# Altium PCB PCB1.PcbDoc
Units mm, origin at the board's own origin, x right, y up, seen from the top; angles counter-clockwise.
Board outline 100 x 120 mm, 2 copper layers (Top Layer, Bottom Layer); 99 components, 94 nets, 331 pads, 140 vias.
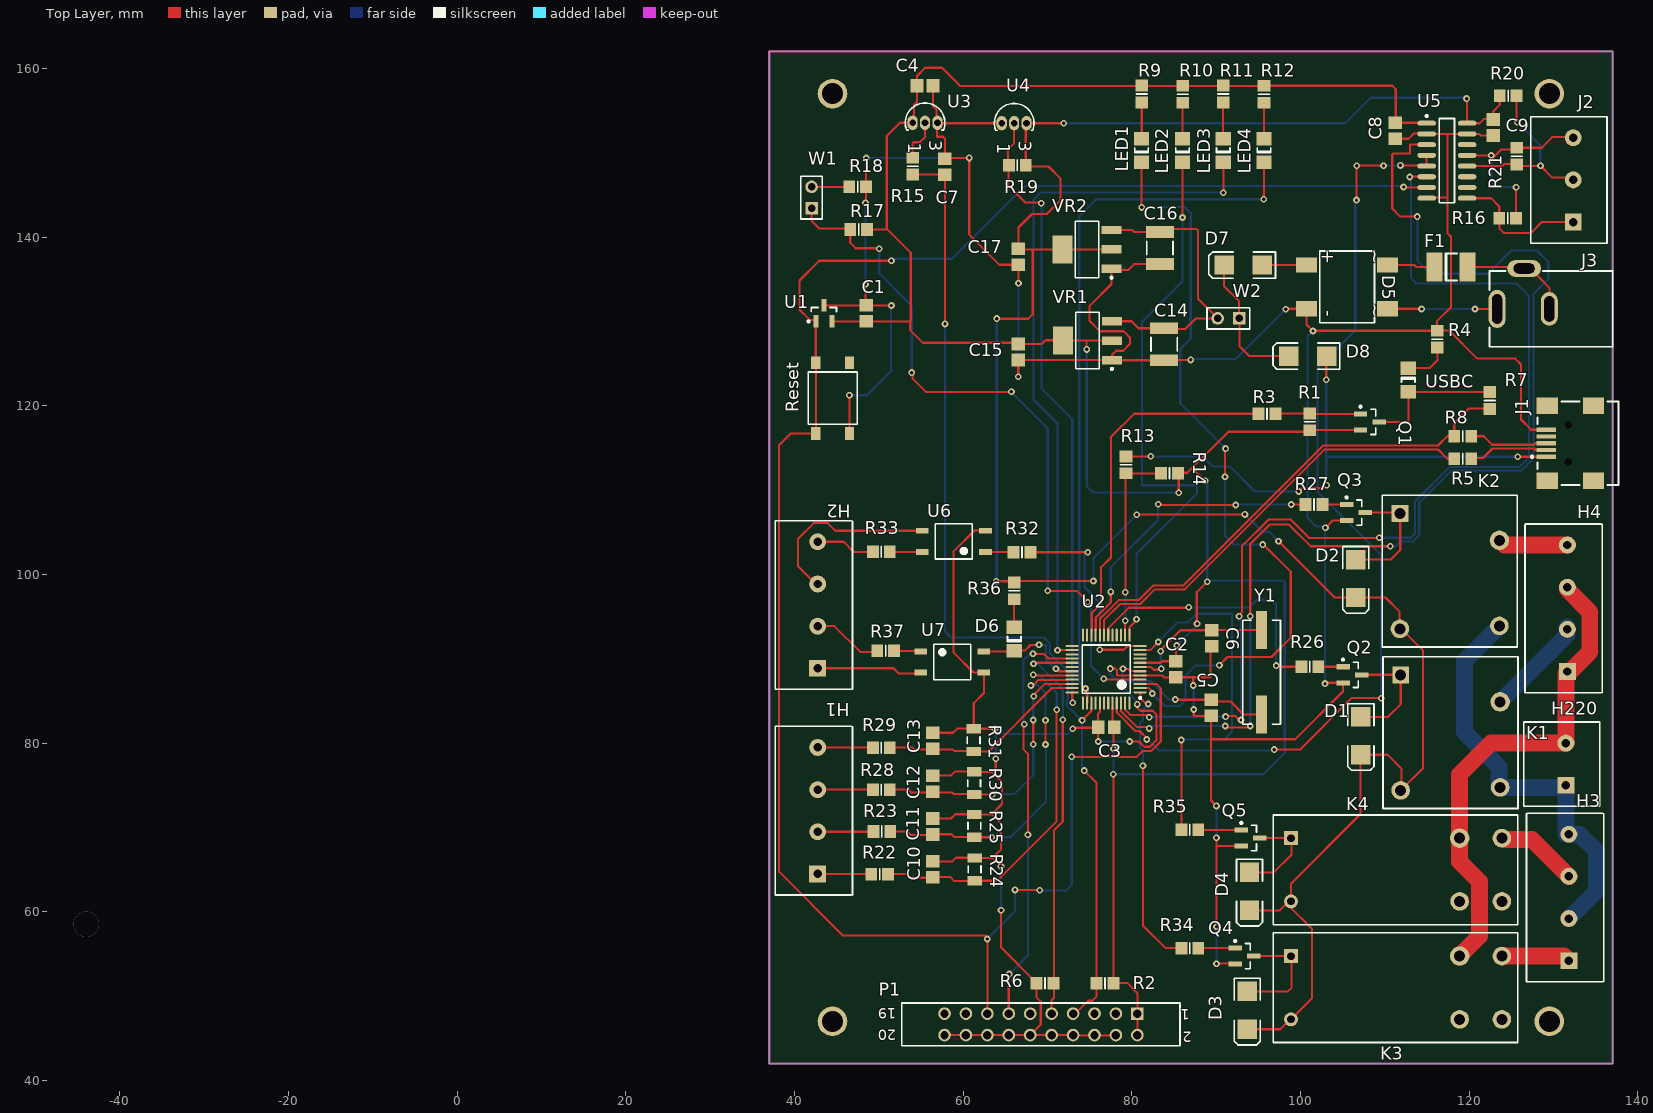
[diagram p0: Top Layer view]
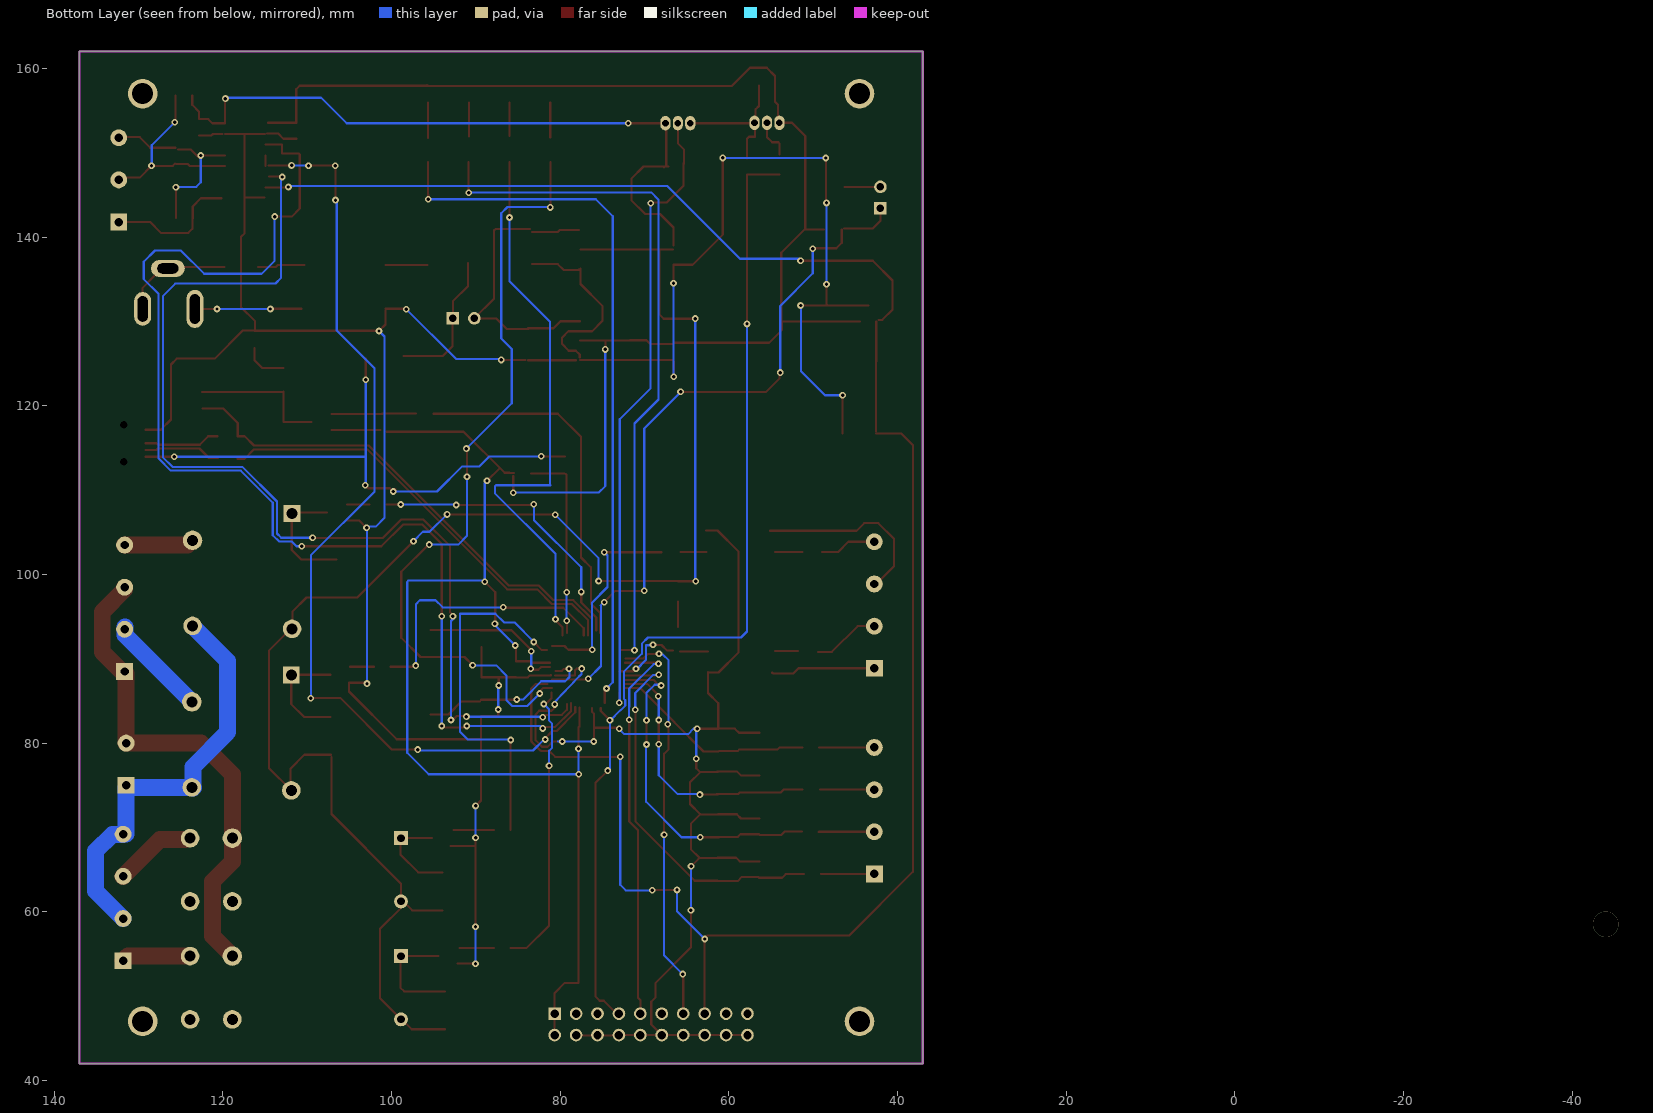
[diagram p1: Bottom Layer view, seen from below]

## Layer stack, top to bottom
Top Layer: signal copper 0.0356
Dielectric: dielectric 0.32, FR-4, Dk 4.8
Bottom Layer: signal copper 0.0356

## Board outline
37,42 37,162 137,162 137,42

## Design rules (kind name [scope] priority, off if disabled: settings)
AcuteAngle [All] p1: minimum=6.00000000000000E+0001
Clearance [All] p1: gap=0.2
DiffPairsRouting [(InNet('D_N') AND InNet('D_P'))] p1: maxlimit=0.254 minlimit=0.254 mostfreqgap=0.254 maxuncoupledlength=12.7
Height [All] p1: minheight=0 maxheight=26 prefheight=12.7
HoleSize [All] p1: absolutevalues=TRUE maxlimit=4.5 minlimit=0.4 maxpercent=80.000 minpercent=20.000
MinimumAnnularRing [All] p1: minimumring=0.2
MinimumSolderMaskSliver [All] p1: minsoldermaskwidth=0.1
PlaneClearance [All] p1: clearance=0.5
PolygonConnect [All] p1: connectstyle=Relief reliefconductorwidth=0.254 reliefentries=4 polygonreliefangle="90 Angle"
RoutingVias [All] p1: holewidth=0.5 width=0.9 viastyle="Through Hole" minholewidth=0.4 minwidth=0.8 maxholewidth=0.7 maxwidth=2.54
SilkToSilkClearance [All] p1 off: silktosilkclearance=0.254
SilkscreenOverComponentPads [All] p1 off: minsilkscreentomaskgap=0.254
SolderMaskExpansion [All] p1: expansion=0.2
ViasUnderSMD [All] p1: allowed=FALSE
Width 220V_relay [InNetClass('220V_r')] p1: maxlimit=2 minlimit=2 preferedwidth=2
Width "Power, GND nets" [(InNet('+3.3V') AND InNet('GND') AND InNet('GND485') AND InNet('VBUS') AND InNet('VCC5') AND InNet('VCC33'))] p2: maxlimit=0.4 minlimit=0.4 preferedwidth=0.4
Width [All] p3: maxlimit=0.254 minlimit=0.254 preferedwidth=0.254
21 further rules are at their usual default settings.

## Classes and differential pairs
component class Sheet1: C1 C2 C3 C4 C5 C6 C7 C8 C9 H1 H2 H3 H4 H220 J1 J2 LED1 Led1 LED2 LED3 LED4 P1 Q1 R1 R2 R3 R4 R5 R6 R7 R8 R9 R10 R11 R12 R13 R14 R15 R16 R17 R18 R19 R20 R21 Reset U1 U2 U3 U4 U5 USBC W1 Y1
component class Slave_Sheet2: C10 C11 C12 C13 C14 C15 C16 C17 D1 D2 D3 D4 D5 D6 D7 D8 F1 J3 K1 K2 K3 K4 Q2 Q3 Q4 Q5 R22 R23 R24 R25 R26 R27 R28 R29 R30 R31 R32 R33 R34 R35 R36 R37 U6 U7 VR1 VR2 W2
net class 220V_r: H3_2 H4_1 NetH3_1 NetH3_3 NetH4_2 NetH4_4
differential pair D2: +D2_P -D2_N
differential pair D1: +D1_P -D1_N

## Components (designator, comment, footprint, x,y, rotation, side; value= is the part's Value field where it differs from the comment)
C1 "Cap Semi" CAPC2012M 48.498,130.947 r270 top
C2 "Cap Semi" CAPC2012M 85.217,88.748 r90 top
C3 "Cap Semi" CAPC2012M 76.947,81.893 r0 top
C4 "Cap Semi" CAPC2012M 55.474,157.937 r180 top
C5 "Cap Semi" CAPC2012M 89.383,84.176 r90 top
C6 "Cap Semi" CAPC2012M 89.459,92.431 r90 top
C7 "Cap Semi" CAPC2012M 57.834,148.344 r270 top
C8 "Cap Semi" CAPC2012M 111.252,152.603 r270 top
C9 "Cap Semi" CAPC2012M 122.834,152.984 r90 top
C10 "Cap Semi" CAPC2012M 56.388,65.024 r270 top
C11 "Cap Semi" CAPC2012M 56.388,70.104 r270 top
C12 "Cap Semi" CAPC2012M 56.388,75.184 r270 top
C13 "Cap Semi" CAPC2012M 56.388,80.264 r270 top
C14 "Cap Pol3" CAPC4532L 83.82,127.279 r270 top
C15 "Cap Semi" CAPC2012M 66.548,126.365 r90 top
C16 "Cap Pol3" CAPC4532L 83.312,138.684 r270 top
C17 "Cap Semi" CAPC2012M 66.548,137.668 r90 top
D1 "SMBJ5.0CA" SMB 107.146,80.859 r270 top
D2 "SMBJ5.0CA" SMB 106.546,99.501 r270 top
D3 "SMBJ5.0CA" SMB 93.683,48.306 r270 top
D4 "SMBJ5.0CA" SMB 93.941,62.41 r270 top
D5 "Bridge1" DB-1S 105.512,134.087 r90 top
D6 "LED2" CD3216-1206 66.04,92.348 r270 top
D7 "SMBJ5.0CA" SMB 93.218,136.677 r180 top
D8 "SMBJ5.0CA" SMB 100.838,125.882 r180 top
F1 "Fuse 2" CD4532-1812 117.856,136.449 r180 top
H1 "Klemnik4_my" Klemnik4_5mm 46.736,61.976 r90 top
H2 "Klemnik4_my" Klemnik4_5mm 46.736,86.36 r90 top
H3 "Klemnik4_my" Klemnik4_5mm 135.814,51.689 r90 top
H4 "Klemnik4_my" Klemnik4_5mm 135.636,85.979 r90 top
H220 "Header 2" Klemnik2_5mm 135.458,72.492 r90 top
J1 "USB-B" "MINI USB" 137,115.545 r0 top
J2 "CON3" Klemnik3_5mm 136.324,139.272 r90 top
J3 "PWR2.5" KLD-0202 137,131.47 r180 top
K1 "Relay-5VDC-10A" TRCF-SB 117.77,81.237 r270 top
K2 "Relay-5VDC-10A" TRCF-SB 117.678,100.387 r270 top
K3 "Relay-5VDC-16A" TRIH-AE 111.265,50.988 r0 top
K4 "Relay-5VDC-16A" TRIH-AE 111.265,64.97 r0 top
LED1 "LED2" CD3216-1206 81.155,150.274 r270 top
LED2 "LED2" CD3216-1206 86.01,150.274 r270 top
LED3 "LED2" CD3216-1206 90.84,150.274 r270 top
LED4 "LED2" CD3216-1206 95.67,150.274 r270 top
P1 "JTAG20" JTAG_SWD_2.54 80.643,47.915 r180 top
Q1 "MMBT2907LT1" SOT23_M 108.204,118.085 r0 top
Q2 "PMBT5551" SOT23_M 106.13,88.092 r0 top
Q3 "PMBT5551" SOT23_M 106.546,107.324 r0 top
Q4 "PMBT5551" SOT23_M 93.341,54.738 r0 top
Q5 "PMBT5551" SOT23_M 94.069,68.736 r0 top
R1 "Res Semi" RESC2012M 101.092,118.085 r270 top
R2 "Res Semi" RESC2012M 76.815,51.535 r180 top
R3 "Res Semi" RESC2012M 96.012,119.05 r180 top
R4 "Res Semi" RESC2012M 116.205,127.889 r270 top
R5 "Res Semi" RESC2012M 119.228,113.716 r0 top
R6 "Res Semi" RESC2012M 69.703,51.535 r180 top
R7 "Res Semi" RESC2012M 122.428,120.625 r90 top
R8 "Res Semi" RESC2012M 119.228,116.383 r0 top
R9 "Res Semi" RESC2012M 81.16,156.946 r270 top
R10 "Res Semi" RESC2012M 86.01,156.928 r270 top
R11 "Res Semi" RESC2012M 90.82,156.946 r90 top
R12 "Res Semi" RESC2012M 95.67,156.928 r270 top
R13 "Res Semi" RESC2012M 79.299,112.979 r90 top
R14 "Res Semi" RESC2012M 84.455,111.989 r180 top
R15 "Res Semi" RESC2012M 54.012,148.395 r90 top
R16 "Res Semi" RESC2012M 124.559,142.226 r180 top
R17 "Res Semi" RESC2012M 47.6,140.894 r0 top
R18 "Res Semi" RESC2012M 47.481,145.948 r180 top
R19 "Res Semi" RESC2012M 66.41,148.523 r0 top
R20 "Res Semi" RESC2012M 124.61,156.748 r0 top
R21 "Res Semi" RESC2012M 125.622,149.588 r270 top
R22 "Res Semi" RESC2012M 50.098,64.455 r180 top
R23 "Res Semi" RESC2012M 50.346,69.512 r180 top
R24 "Res Varistor" RESC3216L 61.36,65.024 r270 top
R25 "Res Varistor" RESC3216L 61.316,70.18 r270 top
R26 "Res Semi" RESC2012M 101.092,89.052 r180 top
R27 "Res Semi" RESC2012M 101.6,108.28 r180 top
R28 "Res Semi" RESC2012M 50.292,74.473 r180 top
R29 "Res Semi" RESC2012M 50.292,79.456 r180 top
R30 "Res Varistor" RESC3216L 61.29,75.235 r270 top
R31 "Res Varistor" RESC3216L 61.239,80.344 r270 top
R32 "Res Semi" RESC2012M 66.964,102.616 r0 top
R33 "Res Semi" RESC2012M 50.292,102.667 r0 top
R34 "Res Semi" RESC2012M 86.868,55.677 r180 top
R35 "Res Semi" RESC2012M 86.868,69.698 r180 top
R36 "Res Semi" RESC2012M 66.04,98.044 r270 top
R37 "Res Semi" RESC2012M 50.8,90.932 r180 top
Reset "Reset" BUTTON 44.526,120.904 r270 top
U1 "MCP130T-300I/TT" SOT-23-TT3_N 43.469,130.947 r90 top
U2 "LPC1343FBD48" LQFP48_L 76.947,88.763 r180 top
U3 "TMP35" PR35 55.474,153.543 r270 top
U4 "DS1820" PR35 66.04,153.492 r270 top
U5 "ADM2483" SO16_N 117.348,149.047 r0 top
U6 "KPC357" Micro-Flat 58.882,103.913 r180 top
U7 "KPC357" Micro-Flat 58.699,89.611 r0 top
USBC "LED2" CD3216-1206 112.776,123.063 r90 top
VR1 "LM1117IMP-3.3" MP04A_N 74.727,127.711 r180 top
VR2 "LM1117IMP-5.0" MP04A_N 74.676,138.532 r180 top
W1 "Jumper" HDR1X2 42.02,143.408 r90 top
W2 "Button_inner" HDR1X2 92.71,130.353 r180 top
Y1 "12MZ" HC-49SM 95.377,88.392 r270 top

## Footprints (in the part's own frame and the unit in brackets; to place one, negate y for a bottom-side part, rotate by r counter-clockwise, add the part's x,y. Pads: shape width x height; smd on the part's side, far side on the other; paste and mask are expansions set on the pad)
BUTTON [mm] "DTSGL-61M"
  rect 1.5x1.1 smd: 1(-4.2,2) 2(4.2,2) 3(-4.2,-2) 4(4.2,-2)
  silkscreen extent -3.1,-2.9 3.1,2.9
CAPC2012M [mm] "Chip Capacitor, Body 2.0x1.3mm, IPC Low Density"
  rect 1.5x1.6 smd: 1(-0.95,0) 2(0.95,0)
  body extent -1.1,-0.72 1.1,0.72, height 1.1
CAPC4532L [mm] "Chip Capacitor, Body 4.5x3.2mm, IPC High Density"
  rect 1.4x3.3 smd: 1(-1.9,0) 2(1.9,0)
  silkscreen extent -0.8,-1.55 0.8,1.55, body extent -2.4,-1.7 2.4,1.7, height 1.4
CD3216-1206 [mm] "Chip Diode; Body 3.2 x 1.6 mm (LxW typ)"
  rect 1.6x1.8 smd: 1(-1.4,0) 2(1.4,0)
  silkscreen extent -0.3,-0.8 0.3,0.8
CD4532-1812 [mm] "Chip Diode; Body 4.5 x 3.2 mm (LxW typ)"
  rect 1.9x3.4 smd: 1(-1.95,0) 2(1.95,0)
  silkscreen extent -0.7,-1.6 0.7,1.6
DB-1S [mm] "Bridge Rectifier; 4 Terminals;"
  rect 1.8x2.5 smd: 1(2.6,4.8) 2(-2.6,-4.8) 3(-2.6,4.8) 4(2.6,-4.8)
  silkscreen extent -4.25,-3.25 4.25,3.25, body extent -4.29,-3.25 4.32,3.22, height 2.5
HC-49SM [mm] "Quartz Crystal,"
  rect 4.5x1.3 smd: 1(-5,0) 2(5,0)
  silkscreen extent -6.15,-2.25 6.15,2.25
HDR1X2 [mm] "Connector; Header; 2 Position"
  rect 1.5x1.5 hole 0.9: 1(0,0)
  round 1.5 hole 0.9: 2(2.54,0)
  silkscreen extent -1.27,-1.27 3.81,1.27
JTAG_SWD_2.54 [mm] "Connector; Header; 10x2 Position"
  rect 1.5x1.5 hole 1: 1(0,0)
  round 1.5 hole 1: 2(0,2.54) 3(2.54,0) 4(2.54,2.54) 5(5.08,0) 6(5.08,2.54) 7(7.62,0) 8(7.62,2.54) 9(10.16,0) 10(10.16,2.54) 11(12.7,0) 12(12.7,2.54) 13(15.24,0) 14(15.24,2.54) 15(17.78,0) 16(17.78,2.54) 17(20.32,0) 18(20.32,2.54) 19(22.86,0) 20(22.86,2.54)
  silkscreen extent -5.08,-1.27 27.94,3.81
KLD-0202 [mm]
  oval 2x4.5 hole 1.2 slot 3.5 at 90 deg: 1(13.7,0)
  oval 2x4 hole 1.2 slot 3 at 90 deg: 2(7.5,0)
  oval 4x2 hole 1.2 slot 2.5 at 0 deg: 3(10.5,-4.8)
  silkscreen extent 0,-4.5 14.6,4.5
Klemnik2_5mm [mm] "Connector; Header; 2 Position"
  rect 2x2 hole 1: 1(2.5,4)
  round 2 hole 1: 2(7.5,4)
  silkscreen extent 0,0 10,9
Klemnik3_5mm [mm] "Connector; Header; 3 Position"
  rect 2x2 hole 1: 1(2.5,4)
  round 2 hole 1: 2(7.5,4) 3(12.5,4)
  silkscreen extent 0,0 15,9.02
Klemnik4_5mm [mm] "Connector; Header; 8 Position"
  rect 2x2 hole 1: 1(2.5,4)
  round 2 hole 1: 2(7.5,4) 3(12.5,4) 4(17.5,4)
  silkscreen extent 0,-0.13 20,9.02
LQFP48_L [mm] "Thin QFP, 48-Leads, Body 7x7mm, Pitch 0.5mm, IPC High Density"
  oval 1.55x0.25 smd: 1(-4.025,2.75) 2(-4.025,2.25) 3(-4.025,1.75) 4(-4.025,1.25) 5(-4.025,0.75) 6(-4.025,0.25) 7(-4.025,-0.25) 8(-4.025,-0.75) 9(-4.025,-1.25) 10(-4.025,-1.75) 11(-4.025,-2.25) 12(-4.025,-2.75) 25(4.025,-2.75) 26(4.025,-2.25) 27(4.025,-1.75) 28(4.025,-1.25) 29(4.025,-0.75) 30(4.025,-0.25) 31(4.025,0.25) 32(4.025,0.75) 33(4.025,1.25) 34(4.025,1.75) 35(4.025,2.25) 36(4.025,2.75)
  oval 0.25x1.55 smd: 13(-2.75,-4.025) 14(-2.25,-4.025) 15(-1.75,-4.025) 16(-1.25,-4.025) 17(-0.75,-4.025) 18(-0.25,-4.025) 19(0.25,-4.025) 20(0.75,-4.025) 21(1.25,-4.025) 22(1.75,-4.025) 23(2.25,-4.025) 24(2.75,-4.025) 37(2.75,4.025) 38(2.25,4.025) 39(1.75,4.025) 40(1.25,4.025) 41(0.75,4.025) 42(0.25,4.025) 43(-0.25,4.025) 44(-0.75,4.025) 45(-1.25,4.025) 46(-1.75,4.025) 47(-2.25,4.025) 48(-2.75,4.025)
  silkscreen extent -4.15,-2.85 2.85,3.55, body extent -3.5,-3.5 3.5,3.5, height 1.6
Micro-Flat [mm] "Micro-Flat"
  rect 1.5x0.7 smd: 1(-3.75,1.257) 2(-3.75,-1.257) 3(3.75,-1.257) 4(3.75,1.257)
  silkscreen extent -2.2,-2.1 2.2,2.1, body extent -2.67,-2.41 2.67,2.41, height 2.3
"MINI USB" [mm] "Connector; USB2.0, Type A, SM; 5 Position; Right Angle"
  rect 2.3x0.5 smd: 1(-7.85,-1.6) 2(-7.85,-0.8) 3(-7.85,0) 4(-7.85,0.8) 5(-7.85,1.6)
  rect 2.5x2 smd: 6(-7.75,4.45) 7(-2.25,4.45) 8(-7.75,-4.45) 9(-2.25,-4.45)
  round 0.6 hole 0.9 unplated: MH1(-5.25,2.2) MH2(-5.25,-2.2)
  silkscreen extent -9.67,-4.95 0.7,4.95
MP04A_N [mm] "SOT223, 4-Leads, Body 6.5x3.5mm, Pitch 2.3mm, Lead Span 7mm, IPC Medium Density"
  rect 2.4x1 smd: 1(-2.9,2.3) 2(-2.9,0) 3(-2.9,-2.3)
  rect 2.4x3.3 smd: 4(2.9,0)
  silkscreen extent -3.03,-3.35 1.4,3.47, body extent -1.85,-3.35 1.85,3.35, height 1.8
PR35 [mm] "TO, Flat Index; 3 In-Line, Axial Leads; Body Dia. 4.6mm; Leads 0.56 x 0.51 mm (max)"
  oval 1.7x1.2 hole 0.8: 1(0,-1.473) 2(0,0) 3(0,1.473)
  silkscreen extent -2.34,-2.35 0.85,2.35
RESC2012M [mm] "Chip Resistor, Body 2.0x1.3mm, IPC Low Density"
  rect 1.4x1.5 smd: 1(-1,0) 2(1,0)
  silkscreen extent 0,-0.65 0,0.65, body extent -1.07,-0.7 1.07,0.7, height 0.65
RESC3216L [mm] "Chip Resistor, Body 3.1x1.6mm, IPC High Density"
  rect 1.1x1.7 smd: 1(-1.35,0) 2(1.35,0)
  silkscreen extent -0.4,-0.75 0.4,0.75, body extent -1.68,-0.87 1.68,0.87, height 2.54
SMB [mm] "DO-214-AA/SMB; 2 C-Bend Leads; Body 5.3 x 3.6 mm, inc. leads (LxW)"
  rect 2.3x2.3 smd: 1(-2.25,0) 2(2.25,0)
  silkscreen extent -3.8,-1.55 4.1,1.55
SO16_N [mm] "SOIC, 16-Leads, Body 9.9x3.9mm, Pitch 1.27mm, IPC Medium Density"
  oval 2.2x0.6 smd: 1(-2.4,4.445) 2(-2.4,3.175) 3(-2.4,1.905) 4(-2.4,0.635) 5(-2.4,-0.635) 6(-2.4,-1.905) 7(-2.4,-3.175) 8(-2.4,-4.445) 9(2.4,-4.445) 10(2.4,-3.175) 11(2.4,-1.905) 12(2.4,-0.635) 13(2.4,0.635) 14(2.4,1.905) 15(2.4,3.175) 16(2.4,4.445)
  silkscreen extent -2.52,-5 0.9,5.42, body extent -1.95,-4.95 1.95,4.95, height 1.75
SOT23_M [mm] "SOT23, 3-Leads, Body 2.9x1.3mm, Pitch 0.95mm, Lead Span 2.3mm, IPC Low Density"
  rect 1.6x0.6 smd: 1(-1.1,0.95) 2(-1.1,-0.95) 3(1.1,0)
  silkscreen extent -1.22,-1.5 0.7,1.92, body extent -0.7,-1.5 0.7,1.5, height 1.1
SOT-23-TT3_N [mm] "SOT23, 3-Leads, Body 2.9x1.3mm, Pitch 0.95mm, Lead Span 2.4mm, IPC Medium Density"
  rect 1.5x0.6 smd: 1(-0.95,0.95) 2(-0.95,-0.95) 3(0.95,0)
  silkscreen extent -1.07,-1.5 0.7,1.92, body extent -0.7,-1.5 0.7,1.5, height 1.12
TRCF-SB [mm] "DIP; 5 Round Pins; Row Space 15.24 mm; Pitch 5 mm"
  rect 2x2 hole 1.3: 1(-6.85,-5.9)
  round 2.2 hole 1.3: 2(6.85,-5.9) 4(6.5,5.9)
  round 2.3 hole 1.3: 3(-3.65,5.9)
  silkscreen extent -9,-8 9,8
TRIH-AE [mm] "DIP; 5 Round Pins; Row Space 15.24 mm; Pitch 5 mm"
  rect 1.65x1.65 hole 0.9: 1(-12.4,3.75)
  round 2.3 hole 1.3: 3(7.6,3.75)
  round 2.2 hole 1.3: 4(12.6,3.75) 5(12.6,-3.75) 6(7.6,-3.75)
  round 1.65 hole 0.9: 8(-12.4,-3.75)
  silkscreen extent -14.5,-6.5 14.5,6.5

## Part data
C1 C2 C3 C4 C5 C6 C7 C8 C9 C10 C11 C12 C13 C15 C17: "Capacitor (Semiconductor SIM Model)"
C14 C16: "Polarized Capacitor (Surface Mount)"
D1 D2 D3 D4 D7 D8: library part "Diode 1N4007", "1 Amp General Purpose Rectifier"
D5: "Full Wave Diode Bridge"
D6 LED1 LED2 LED3 LED4 USBC: "Typical RED, GREEN, YELLOW, AMBER GaAs LED"
F1: "Fuse"
H1 H2 H3 H4: "Header, 4-Pin, 300-041-12"
H220: "Header, 2-Pin"
J1: library part "USB connector 5", "USB connector, 5-Pin"
J2: library part "RS485 Klemnik 3", "Header, 3-Pin"
J3: "Low Voltage Power Supply Connector"
K1 K2: "TRCF-5VDC-SB-A"
K3 K4: "TRIH-5VDC-SD-1AE-R"
P1: library part "Header 10X2", "Header, 10-Pin, Dual row"
Q1: "General Purpose Transistor PNP Silicon"
Q2 Q3 Q4 Q5: "NPN Switching Transistor"
R1 R2 R3 R4 R5 R6 R7 R8 R9 R10 R11 R12 R13 R14 R15 R16 R17 R18 R19 R20 R21 R22 R23 R26 R27 R28 R29 R32 R33 R34 R35 R36 R37: "Semiconductor Resistor"
R24 R25 R30 R31: "Varistor (Voltage-Sensitive Resistor)"
Reset: library part BUTTON, "DTSGL-61M"
U1: "Microcontroller Supervisory Circuit with Open Drain Output, 3-Pin SOT-23, Industrial Temperature, Tape and Reel"
U2: "ARM-based 32-bit MCU with 64 Kbytes Flash, 48-pin LQFP, Industrial Temperature"
U4: "1-Wire Digital Thermometer"
U5: "isolated rs-485 driver"
U6 U7: library part Optoisolator1, "4-Pin Phototransistor Optocoupler"
VR1 VR2: "800mA Low-Dropout Linear Regulator"
W1: "Jumper Wire"
W2: "Power Button"
Y1: library part XTAL, "Crystal Oscillator"

## Free pads (board coordinates)
  round 3.5 hole 2.5 unplated: 0(44.5,47) 0(44.5,157) 0(129.5,47) 0(129.5,157)

## Via types
v1: diameter 0.8, hole 0.4, Top Layer to Bottom Layer, 139 vias
v2: diameter 3, hole 3, Top Layer to Bottom Layer, 1 vias

## Nets (pads, with @x,y where several pads share a name; then routed paths per layer and width w, separated by ;. In a path a pad name is that pad's centre, name@x,y a point inside that pad or via, vN(x,y) a via of type N, cw(c..) or ccw(c..) an arc to the next point about the centre after c; other vN are vias at no path point)
D1_N: R5.1 U2.19 | length 52.2
  Top Layer w0.254: U2.19 76.697,93.701 76.674,93.724 76.674,94.556 78.613,96.495 80.972,96.495 82.702,98.225 86.262,98.225 102.859,114.822 116.292,114.822 117.399,113.716 R5.1
D1_P: R7.1 R8.1 U2.20 | length 59.4
  Top Layer w0.254: U2.20 76.197,93.701 76.22,93.724 76.22,94.744 78.425,96.949 80.784,96.949 82.514,98.679 86.074,98.679 102.671,115.276 116.292,115.276 117.399,116.383 R8.1 118.228,117.948 119.939,119.659 R7.1@122.377,119.659
D2_N: J1.2 R5.2 | length 9.1
  Top Layer w0.254: R5.2@120.574,113.792 121.633,113.792 122.758,114.918 127.691,114.918 127.864,114.745 J1.2
D2_P: J1.3 R8.2 | length 9
  Top Layer w0.254: R8.2@120.65,116.383 121.717,116.383 122.728,115.372 127.691,115.372 127.864,115.545 J1.3
GND: C1.1 C2.1 C3.1 C4.1 C5.1 C6.1 C7.1 C8.2 C9.1 C10.1 C11.1 C12.1 C13.1 C14.2 C15.1 C16.2 C17.1 D5.3 J1.5 P1.4 P1.6 P1.8 P1.10 P1.12 P1.14 P1.16 P1.18 P1.20 Q2.2 Q3.2 Q4.2 Q5.2 R4.1 R6.2 R18.1 R24.1 R25.1 R30.1 R31.1 Reset.2 U1.3 U2.5 U2.41 U3.3 U4.1 U5.2 U5.8 U5.15 U6.2 U7.3 VR1.1 VR2.1 | length 522.5
  Top Layer w0.254: U1.3 C1.1@48.336,131.897 ; v1(46.507,121.234) 46.526,121.215 Reset.2 ; C1.1@48.336,131.978 48.438,131.877 v1(51.486,131.877) ; C1.1@48.412,132.08 v1(48.412,134.391) ; v1(48.412,144.043) 48.481,144.112 R18.1 48.481,149.335 v1(48.514,149.368) ; C1.1 C1.1@48.585,131.897 ; C10.1 58.71,65.974 59.131,66.396 R24.1@61.316,66.396 ; C11.1 58.557,71.054 59.055,71.552 R25.1@61.29,71.552 ; C12.1 58.532,76.134 59.004,76.606 R30.1@61.392,76.606 ; C13.1 58.786,81.214 59.284,81.712 R31.1@61.239,81.712 ; C4.1 56.424,155.539 56.82,155.143 U3.3@56.82,153.67 ; U3.3@56.896,153.441 56.896,151.892 57.607,151.892 57.834,151.666 C7.1 ; U3.3@56.998,153.492 U4.1@64.668,153.492 ; P1.20 P1.18 P1.16 P1.14 P1.12 ; C7.1@57.937,149.377 v1(60.706,149.377) 60.706,140.284 64.287,136.703 C17.1@66.446,136.703 ; R30.1 63.428,76.585 63.856,77.013 v1(63.856,78.13) ; R25.1 63.351,71.53 63.373,71.552 ; R24.1 63.453,66.374 64.491,67.412 64.491,70.434 63.373,71.552 ; U7.3 61.226,88.354 58.864,90.716 58.864,102.73 61.329,105.194 U6.2@62.7,105.194 ; U7.3@62.459,88.443 62.459,85.928 61.239,84.709 R31.1@61.239,81.712 ; 63.398,76.556 64.592,75.362 64.592,72.771 63.373,71.552 ; 63.525,66.294 63.576,66.294 v1(64.465,65.405) ; v1@63.746,81.694 R31.1 R31.1@61.239,81.712 ; v1(64.491,60.173) 64.491,55.748 R6.2 ; v1(66.523,123.444) C15.1@66.523,125.222 ; v1(66.548,134.518) C17.1 ; C15.1@66.638,125.411 VR1.1 ; R6.2@68.707,51.435 68.707,49.809 69.19,49.327 69.19,46.622 P1.12 ; v1(73,81.686) 73.127,81.813 C3.1@75.997,81.813 ; v1(75.997,80.188) C3.1 75.997,83.49 76.2,83.693 U2.41@76.2,84.15 ; v1(77.445,88.824) 78.029,88.824 78.232,88.621 78.232,88.062 78.283,88.011 U2.5@80.569,88.011 ; VR2.1 77.576,134.421 74.985,131.83 74.985,130.044 76.2,128.829 79.019,128.829 79.756,128.092 79.756,127.305 78.969,126.517 78.13,126.517 77.673,126.06 VR1.1@77.673,125.705 ; VR2.1@77.775,136.144 77.826,136.093 79.578,136.093 80.269,136.784 C16.2 ; VR1.1@78.125,125.379 C14.2 ; P1.4@78.207,45.339 73.127,45.339 73.09,45.375 P1.8 P1.10 P1.12 ; v1(79.731,80.188) 80.264,80.188 80.848,80.188 81.483,79.553 82.144,79.553 82.906,80.315 82.906,83.388 82.474,83.82 81.013,83.82 v1@80.645,84.188 ; U2.5@81.102,88.036 81.077,88.011 83.591,88.011 83.82,87.782 C2.1@85.09,87.782 ; C14.2@84.125,125.425 v1(86.97,125.425) ; C2.1 89.306,87.798 C6.1@89.306,91.364 ; v1(87.274,86.817) 87.274,87.63 ; 87.325,83.236 87.335,83.226 ; v1(87.335,83.983) 87.335,83.226 ; 89.433,80.442 99.365,80.442 105.03,86.107 Q2.2 102.991,87.142 v1(102.895,87.046) ; 90.018,67.793 v1(90.018,68.783) ; v1(90.018,72.542) 89.383,73.177 C5.1 87.335,83.226 ; v1(90.024,58.224) 90.024,67.786 Q5.2 ; v1@90.119,53.746 v1(90.024,53.841) Q4.2@92.133,53.841 ; v1(98.247,131.445) 98.289,131.487 D5.3 ; D5.3@100.711,131.293 100.711,129.616 v1@101.438,128.889 ; v1(101.473,128.854) v1@101.438,128.889 ; v1(102.946,105.537) 102.972,105.537 103.835,106.401 105.258,106.401 Q3.2@105.258,106.477 ; C8.2 112.817,151.653 113.436,152.273 U5.2@114.757,152.273 ; U5.2@114.986,152.222 117.399,152.222 ; U5.8@115.062,144.678 117.399,144.678 ; R4.1@116.154,129.083 116.154,129.997 117.831,131.674 117.831,140.03 117.399,140.462 117.399,144.678 ; R4.1 v1@101.438,128.889 ; R4.1@116.357,128.93 117.602,128.93 120.955,125.578 125.451,125.578 126.137,124.892 126.137,118.364 127.356,117.145 J1.5 ; U5.15 117.399,152.222 ; U5.15@120.04,152.222 121.158,152.222 121.346,152.034 C9.1 ; 117.399,144.678 117.399,152.222
  Bottom Layer w0.254: v1(46.507,121.234) 48.59,121.234 51.435,124.079 51.435,131.826 v1(51.486,131.877) ; v1(48.412,134.391) v1(48.412,144.043) ; v1(48.514,149.368) 60.697,149.368 v1(60.706,149.377) ; v1(63.754,81.686) v1@63.856,81.585 ; v1(63.856,78.13) v1@63.856,81.585 ; v1@63.856,81.636 v1@63.856,81.585 ; v1@63.957,81.686 64.195,81.686 64.821,81.06 72.314,81.06 ; v1(64.465,65.405) 64.491,65.38 v1(64.491,60.173) ; v1(66.523,123.444) 66.548,123.469 v1(66.548,134.518) ; 72.314,81.077 72.314,81.06 ; v1@73,81.661 72.399,81.06 72.314,81.06 ; v1(75.997,80.188) 80.264,80.188 v1(79.731,80.188) ; v1(77.445,88.824) 77.445,88.189 77.749,87.884 ; 77.775,87.871 v1@80.756,84.743 ; v1(86.97,125.425) 87.071,125.527 92.329,125.527 v1(98.247,131.445) ; v1(87.274,86.817) 87.335,86.756 v1(87.335,83.983) ; v1(90.018,72.542) v1(90.018,68.783) v1@90.043,68.809 ; v1(90.024,53.841) v1(90.024,58.224) ; v1(101.473,128.854) 100.813,128.194 100.813,106.705 101.854,105.664 v1@102.972,105.664 ; v1(102.895,87.046) 102.895,105.486 v1(102.946,105.537)
  other v1: 80.62,84.582
GND485: J2.1 R16.2 U5.9 | length 15.9
  Top Layer w0.254: U5.9@120.154,144.591 122.592,144.591 123.559,143.623 R16.2 ; R16.2@123.596,142.189 123.596,140.97 124.079,140.487 127.33,140.487 128.615,141.772 J2.1
H3_2: H3.2 H3.4 H220.1 K1.4 K2.4 | length 60
  Bottom Layer w2: K1.4@123.469,74.727 K1.4@123.546,74.727 ; K1.4@123.546,74.651 K1.4@123.546,74.727 ; K2.4 119.431,89.74 119.431,81.28 123.546,77.165 ; H3.4@131.458,69.189 H220.1@131.458,74.727 ; H3.2 135.077,62.453 135.077,67.183 133.096,69.164 H3.4@131.826,69.164 ; K1.4@123.546,74.727 123.546,74.737 123.546,77.165 ; K1.4@123.546,74.727 123.67,74.727 H220.1@131.458,74.727 ; K1.4@123.546,74.727 123.546,77.165 ; K1.4@123.546,74.727 H220.1@131.458,74.727
H4_1: H4.1 H4.3 H220.2 K3.3 K4.3 | length 57.2
  Top Layer w2: K3.3@119.126,55.042 121.209,57.125 121.209,63.576 118.847,65.938 118.847,68.72 118.847,76.276 122.58,80.01 H220.2@131.115,80.01 ; H220.2 H4.1@131.458,88.253 ; H4.3 131.636,98.183 134.29,95.529 134.29,90.805 H4.1@131.978,88.494
NetC5_2: C5.2 U2.6 Y1.2 | length 20.4
  Top Layer w0.254: v1@79.172,88.798 v1(78.943,88.798) 79.553,88.798 79.807,88.544 U2.6@80.518,88.544 ; v1@85.176,85.126 C5.2 ; C5.2@89.51,84.938 91.694,84.938 93.24,83.392 Y1.2
  Bottom Layer w0.254: v1@78.892,88.621 78.892,87.833 79.4,87.325 79.451,87.325 ; 79.527,87.325 82.245,87.325 83.261,86.309 ; 83.261,86.284 84.379,85.166 v1@84.861,85.166
  other v1: 85.141,85.166
NetC6_2: C6.2 U2.7 Y1.1 | length 17.9
  Top Layer w0.254: U2.7@81.204,89.002 82.271,89.002 82.575,88.697 83.414,88.697 83.515,88.798 v1@83.541,88.798 ; v1(83.414,90.881) 83.414,91.034 85.761,93.381 C6.2 ; C6.2@89.506,93.392 Y1.1
  Bottom Layer w0.254: v1(83.414,90.881) 83.414,88.697 83.515,88.798 v1@83.541,88.798
  other v1: 83.464,88.798
NetC14_1: C14.1 C16.1 VR1.3 VR2.3 W2.2 | length 34.8
  Top Layer w0.254: VR1.3 79.945,130.011 80.777,129.179 C14.1 ; VR2.3@77.775,140.818 80.061,140.818 80.294,140.584 C16.1 ; C16.1@83.566,140.97 87.63,140.97 87.833,140.767 87.833,132.69 W2.2 87.605,130.353 86.36,129.108 C14.1@83.769,129.108
NetD1_1: D1.1 K1.1 Q2.3 | length 18.2
  Top Layer w0.254: D1.1@107.213,83.083 110.338,83.083 111.87,84.616 K1.1 ; K1.1@111.87,88.092 Q2.3 K1.1@111.984,88.092
NetD2_1: D2.1 K2.1 Q3.3 | length 13.7
  Top Layer w0.254: D2.1 110.666,101.751 111.811,102.895 111.811,107.036 K2.1@111.887,107.112 ; Q3.3 107.662,107.34 K2.1@111.379,107.34
NetD3_1: D3.1 K3.1 Q4.3 | length 13.1
  Top Layer w0.254: D3.1 98.485,50.556 98.933,51.003 K3.1@98.933,54.559 ; Q4.3 K3.1@98.577,54.738
NetD4_1: D4.1 K4.1 Q5.3 | length 11.5
  Top Layer w0.254: D4.1 96.816,64.66 98.941,66.785 K4.1@98.941,68.622 ; Q5.3 K4.1@98.93,68.736
NetD5_1: D5.1 D7.1 | length 5
  Top Layer w0.254: D7.1@95.742,136.687 D5.1
NetD5_2: D5.2 J3.1 | length 12.6
  Top Layer w0.254: D5.2@110.693,131.496 114.325,131.496 v1(114.351,131.47) ; v1(120.675,131.47) J3.1
  Bottom Layer w0.254: v1(114.351,131.47) v1(120.675,131.47)
NetD5_4: D5.4 F1.2 | length 5.6
  Top Layer w0.254: D5.4 113.478,136.687 113.741,136.423 F1.2@115.824,136.423
NetD6_1: D6.1 R36.2 | length 3
  Top Layer w0.254: D6.1 R36.2@66.04,96.774
NetD7_2: D7.2 D8.2 W2.1 | length 19.6
  Top Layer w0.254: W2.1 92.71,132.385 90.907,134.188 ; W2.1@92.761,130.302 92.761,127.051 93.929,125.882 D8.2 ; 90.907,134.188 90.907,136.677 90.907,136.906 90.907,134.188
NetF1_1: F1.1 J3.2 J3.3 | length 15.4
  Top Layer w0.254: F1.1 124.13,136.449 J3.3@126.238,136.449 ; J3.3@126.517,136.195 127.279,136.195 128.321,135.153 129.5,133.974 J3.2 J3.2@129.5,133.288 ; J3.3@126.238,136.449 126.458,136.229 126.517,136.169 J3.3@126.238,136.449
NetH1_1: H1.1 R22.2 | length 6.3
  Top Layer w0.254: H1.1 49.062,64.476 R22.2@49.073,64.465
NetH1_2: H1.2 R23.2 | length 6.7
  Top Layer w0.254: H1.2 R23.2@49.294,69.476 ; R23.2@49.294,69.476 49.302,69.468 49.327,69.444 R23.2@49.294,69.476
NetH1_3: H1.3 R28.2 | length 6.4
  Top Layer w0.254: H1.3 49.146,74.476 R28.2@49.149,74.473
NetH1_4: H1.4 R29.2 | length 6.5
  Top Layer w0.254: H1.4 R29.2@49.277,79.476
NetH2_1: H2.1 U7.2 | length 12.4
  Top Layer w0.254: H2.1 51.729,88.86 52.324,88.265 54.762,88.265 U7.2@54.839,88.341
NetH2_2: H2.2 R37.2 | length 7.9
  Top Layer w0.254: H2.2 44.722,93.86 47.777,90.805 R37.2@49.403,90.805
NetH2_3: H2.3 U6.3 | length 22.1
  Top Layer w0.254: H2.3@42.52,98.831 42.52,98.857 40.411,100.965 40.411,104.216 42.266,106.07 43.942,106.07 44.842,105.17 U6.3
NetH2_4: H2.4 R33.1 | length 6.7
  Top Layer w0.254: H2.4 45.822,103.86 47.041,102.641 R33.1@48.946,102.641
NetH3_1: H3.1 K3.4 | length 7.9
  Top Layer w2: K3.4@124.155,54.737 131.266,54.737 H3.1
NetH3_3: H3.3 K4.4 | length 9.2
  Top Layer w2: K4.4@124.384,68.58 127.423,68.58 H3.3
NetH4_2: H4.2 K1.3 | length 13.1
  Bottom Layer w2: K1.3 H4.2@131.597,92.814 ; H4.2@131.597,92.814 131.597,93.479 131.597,93.777 H4.2@131.597,92.814
NetH4_4: H4.4 K2.3 | length 7.5
  Top Layer w2: K2.3@124.156,103.479 H4.4
NetJ2_2: J2.2 R20.2 R21.2 U5.12 | length 22.8
  Top Layer w0.254: U5.12 123.927,148.412 124.181,148.666 R21.2@125.451,148.666 ; R20.2 125.61,153.688 v1(125.705,153.594) ; R21.2@125.679,148.692 125.933,148.438 v1(128.448,148.438) 129.845,147.041 J2.2@132.004,147.041 ; J2.2@132.156,147.041 J2.2@132.004,147.041 ; J2.2@132.283,146.761 J2.2@132.004,147.041
  Bottom Layer w0.254: v1(125.705,153.594) 128.422,150.876 v1@128.422,148.463
NetJ2_3: J2.3 R16.1 R21.1 U5.13 | length 22.8
  Top Layer w0.254: U5.13 v1@122.58,149.682 ; v1(122.606,149.657) v1@122.58,149.682 ; v1@122.872,149.441 123.825,150.393 R21.1@125.324,150.393 ; R16.1@125.552,142.24 v1(125.552,145.898) ; R21.1 128.592,150.588 129.845,151.841 J2.3@132.131,151.841 ; v1@122.58,149.682 122.606,149.682 v1@122.58,149.682
  Bottom Layer w0.254: v1(122.606,149.657) 122.606,146.482 123.139,145.948 125.501,145.948 v1(125.552,145.898)
NetLED1_1: LED1.1 R9.2 | length 4.1
  Top Layer w0.254: LED1.1@81.16,151.809 R9.2
NetLED2_1: LED2.1 R10.2 | length 3.9
  Top Layer w0.254: LED2.1@86.01,152.013 R10.2
NetLED3_1: LED3.1 R11.1 | length 4
  Top Layer w0.254: LED3.1@90.82,151.928 R11.1
NetLED4_1: LED4.1 R12.2 | length 4.2
  Top Layer w0.254: LED4.1@95.67,151.751 R12.2
NetQ1_1: Q1.1 R1.1 R3.1 | length 16
  Top Layer w0.254: R3.1@97.088,119.085 R1.1 ; R1.1@101.082,119.035 101.092,119.035 Q1.1 R1.1@101.082,119.035
NetQ1_3: Q1.3 R7.2 USBC.1 | length 16.4
  Top Layer w0.254: Q1.3@109.474,118.059 112.776,118.059 USBC.1 ; USBC.1@112.944,121.625 R7.2
NetQ2_1: Q2.1 R26.1 | length 2.8
  Top Layer w0.254: R26.1 Q2.1@104.902,89.052
NetQ3_1: Q3.1 R27.1 | length 2.7
  Top Layer w0.254: R27.1 Q3.1@105.258,108.28
NetQ4_1: Q4.1 R34.1 | length 4.1
  Top Layer w0.254: R34.1 Q4.1@91.948,55.677
NetQ5_1: Q5.1 R35.1 | length 4.8
  Top Layer w0.254: R35.1 Q5.1@92.634,69.698
NetR4_2: R4.2 USBC.2 | length 5.3
  Top Layer w0.254: USBC.2 115.319,124.463 116.23,125.374 R4.2@116.23,126.822
NetR15_2: R15.2 U3.2 | length 4.8
  Top Layer w0.254: R15.2@54,149.784 54,151.105 54.127,151.232 54.864,151.232 55.474,151.841 U3.2
NetR18_2: R18.2 W1.2 | length 4.3
  Top Layer w0.254: W1.2 R18.2@46.279,145.948
NetR32_1: R32.1 U6.1 | length 3.1
  Top Layer w0.254: U6.1 R32.1@65.695,102.656
NetR33_2: R33.2 U6.4 | length 3.2
  Top Layer w0.254: R33.2 U6.4@54.483,102.667
NetR37_1: R37.1 U7.1 | length 2.7
  Top Layer w0.254: R37.1 U7.1@54.508,90.932
PIO0_0: P1.15 Reset.3 Reset.4 U1.1 U2.3 U5.7 | length 238.8
  Top Layer w0.254: 42.215,130.175 41.808,130.175 40.589,131.394 40.589,134.849 42.926,137.185 v1(51.486,137.185) ; Reset.3@42.519,125.273 U1.1 ; Reset.4 39.539,116.704 38.176,115.341 38.176,64.719 45.72,57.175 62.56,57.175 v1@62.789,56.947 ; Reset.4@42.526,116.923 Reset.3 ; P1.15 v1(62.863,56.771) ; v1(66.142,62.586) 69.012,62.586 v1(69.063,62.535) ; v1(72.873,78.359) 80.594,78.359 81.299,79.064 82.226,79.064 82.261,79.099 82.332,79.099 83.36,80.127 83.36,80.197 83.414,80.251 83.414,86.487 82.88,87.02 U2.3@81.483,87.02 ; v1(112.217,145.923) 112.268,145.872 U5.7
  Bottom Layer w0.254: v1(51.486,137.185) 51.714,137.414 58.674,137.414 67.31,146.05 v1@112.217,146.05 ; v1(62.863,56.771) 66.142,60.05 v1(66.142,62.586) ; v1(69.063,62.535) 72.212,62.535 72.873,63.195 v1(72.873,78.359)
PIO0_1: R17.1 U2.4 W1.1 | length 85.9
  Top Layer w0.254: W1.1 42.02,141.902 42.909,141.013 R17.1@46.338,141.013 ; R17.1 46.6,139.303 47.244,138.659 49.987,138.659 v1(50.038,138.608) ; v1(53.899,123.927) 53.975,123.85 53.975,123.241 55.575,121.641 v1(65.71,121.641) ; v1(70.028,98.044) 73.457,98.044 74.803,96.698 v1(74.752,96.698) ; v1(76.657,87.63) 76.774,87.513 U2.4
  Bottom Layer w0.254: v1(50.038,138.608) 50.038,135.687 53.899,131.826 v1(53.899,123.927) ; v1(65.71,121.641) 65.71,121.615 70.028,117.297 v1(70.028,98.044) ; v1(74.752,96.698) 74.803,96.698 75.175,96.326 75.159,96.309 75.159,89.129 v1(76.657,87.63)
PIO0_2: U2.10
PIO0_3: R13.1 R14.2 U2.14 | length 22.7
  Top Layer w0.254: U2.14@79.197,93.066 v1(79.197,94.488) ; v1(79.223,97.866) 79.223,111.785 R13.1@79.299,111.862 ; R13.1@79.502,111.979 R14.2@83.423,111.979
  Bottom Layer w0.254: v1@79.223,94.488 v1(79.223,97.866)
PIO0_4: U2.15
PIO0_5: U2.16
PIO0_6: R3.2 U2.22 | length 42.8
  Top Layer w0.254: U2.22@75.235,93.066 75.235,95.428 76.352,96.545 76.352,100.838 77.521,102.006 77.521,116.307 80.264,119.05 R3.2
PIO0_7: U2.23
PIO0_8: U2.27
PIO0_9: P1.13 U2.28 | length 59.8
  Top Layer w0.254: P1.13 65.403,52.551 v1(65.456,52.603) ; v1(67.666,69.139) 67.666,78.74 67.132,79.273 ; v1(68.275,90.576) 69.545,90.576 70.104,90.018 U2.28@72.238,90.018 ; 67.132,79.273 67.132,82.22 67.132,79.273
  Bottom Layer w0.254: v1(65.456,52.603) 67.666,54.813 v1(67.666,69.139) ; v1(68.275,90.576) v1@68.275,90.5 ; 67.132,89.814 67.818,90.5 ; 67.132,89.814 67.132,82.22 67.132,89.814 ; 67.818,90.5 v1@68.275,90.5 ; 67.818,90.5 v1@68.275,90.5
  other v1: 67.234,82.22
PIO0_10: P1.9 R6.1 U2.29 | length 47.9
  Top Layer w0.254: v1@68.326,89.357 68.494,89.525 72.298,89.525 U2.29@72.314,89.51 ; P1.9 70.483,49.528 70.764,49.809 70.764,69.647 71.806,70.688 v1(71.806,82.753)
  Bottom Layer w0.254: v1@68.326,89.357 68.91,89.357 71.806,86.462 71.806,84.264 71.822,84.248 71.822,82.769 v1(71.806,82.753)
  other v1: 68.326,89.408
PIO0_11: C10.2 R22.1 R24.2 U2.32 | length 46.6
  Top Layer w0.254: R22.1 53.248,64.455 53.67,64.033 C10.2@56.413,64.033 ; R24.2 64.03,63.674 71.069,70.714 71.069,83.922 v1(71.095,83.947) ; R24.2@61.468,63.627 58.953,63.627 58.445,64.135 C10.2@56.515,64.135 ; v1@68.326,88.062 v1@68.402,87.986 ; v1@68.402,88.011 U2.32@72.441,88.011 ; C10.2@56.413,64.033 C10.2@56.515,64.135 ; C10.2@56.413,64.033 C10.2@56.515,64.135
  Bottom Layer w0.254: v1@68.326,88.087 68.936,88.087 71.095,85.928 v1(71.095,83.947)
  other v1: 68.301,88.087
PIO1_0: C11.2 R23.1 R25.2 U2.33 | length 39.4
  Top Layer w0.254: R23.1 53.348,69.512 53.772,69.088 C11.2@56.312,69.088 ; R25.2@61.214,68.809 61.163,68.859 58.953,68.859 58.623,69.19 C11.2@56.413,69.19 ; R25.2 v1(63.377,68.83) ; v1@68.351,86.919 68.91,87.478 U2.33@72.212,87.478 ; v1(69.748,79.832) v1(69.748,82.702) ; C11.2@56.312,69.088 56.383,69.159 C11.2@56.413,69.19 ; C11.2@56.312,69.088 C11.2@56.413,69.19
  Bottom Layer w0.254: v1(63.377,68.83) 65.604,68.83 69.799,73.025 69.799,79.781 v1(69.748,79.832) ; v1@68.351,86.919 68.783,86.919 69.748,85.954 v1(69.748,82.702)
  other v1: 68.021,86.817
PIO1_1: C12.2 R28.1 R30.2 U2.34 | length 40.2
  Top Layer w0.254: R28.1 53.518,74.473 53.848,74.143 56.363,74.143 C12.2@56.388,74.117 ; R30.2 v1(63.42,73.885) ; R30.2@61.443,73.965 R30.2@61.417,73.939 ; v1(68.301,79.858) v1(68.301,82.728) ; v1@68.351,85.7 69.672,87.02 U2.34@72.365,87.02 ; C12.2@56.388,74.117 58.725,74.117 ; C12.2@56.388,74.117 58.725,74.117 ; 58.725,74.117 58.903,73.939 ; 58.903,73.939 61.29,73.939 R30.2@61.417,73.939 ; 58.903,73.939 R30.2@61.417,73.939
  Bottom Layer w0.254: v1(63.42,73.885) 63.475,73.939 66.065,73.939 68.301,76.175 v1(68.301,79.858) ; v1@68.351,85.7 v1@68.301,85.649 ; v1@68.301,85.649 68.301,85.547 v1(68.301,82.728) v1@68.301,85.649
  other v1: 68.351,85.547
PIO1_2: C13.2 R29.1 R31.2 U2.35 | length 28.9
  Top Layer w0.254: R29.1 53.996,79.456 54.204,79.248 ; R31.2@61.138,79.045 58.953,79.045 58.75,79.248 ; R31.2 62.992,78.994 66.455,82.457 66.455,82.5 70.467,86.512 U2.35@72.39,86.512 ; 54.204,79.248 56.388,79.248 58.75,79.248 ; 54.204,79.248 58.75,79.248
PIO1_3: C7.2 P1.7 R2.2 R15.1 U2.39 | length 121
  Top Layer w0.254: R15.1 57.835,147.395 v1(57.835,129.694) ; P1.7 73.29,47.915 74.825,49.45 ; v1(74.092,82.702) 75.184,83.795 U2.39@75.184,84.125 ; v1(74.346,76.733) 75.815,75.264 R2.2 ; 74.854,49.479 74.825,49.45 ; R2.2@75.819,51.638 75.819,49.962 75.307,49.45 74.825,49.45
  Bottom Layer w0.254: v1(57.835,129.694) 57.835,93.219 58.547,92.507 69.571,92.507 70.307,91.77 70.307,90.576 72.441,88.443 72.441,85.255 72.273,85.086 72.273,84.439 72.822,83.89 ; 72.847,83.871 74.016,82.702 v1(74.092,82.702) 74.092,76.987 v1(74.346,76.733)
PIO1_4: U2.40
PIO1_5: U2.45 U5.4 U5.5 | length 113.9
  Top Layer w0.254: U2.45@78.207,84.277 78.207,83.642 80.414,81.435 80.897,81.435 v1@81.864,80.467 ; v1(96.876,79.223) 99.924,79.223 106.02,85.319 v1(109.55,85.319) ; v1(106.629,144.374) 106.629,148.438 v1(106.655,148.463) v1(109.83,148.463) ; v1(111.836,148.488) 114.529,148.488 U5.5@114.554,148.463 ; U5.5@114.948,148.4 U5.5 U5.4
  Bottom Layer w0.254: v1@81.864,80.467 83.21,79.121 96.774,79.121 v1(96.876,79.223) ; v1(106.629,144.374) 106.477,144.221 106.477,128.905 102.006,124.435 102.006,109.804 109.55,102.26 v1(109.55,85.319) ; v1(109.83,148.463) 111.862,148.463 v1(111.836,148.488)
  other v1: 81.763,80.416
PIO1_6: U2.46 U5.3 | length 142.7
  Top Layer w0.254: U2.46 78.697,83.807 80.615,81.889 82.119,81.889 v1@82.169,81.839 ; v1(91.059,82.017) 91.228,81.848 93.862,81.848 v1(94.031,82.017) ; v1(94.031,95.047) 94.031,103.607 96.317,105.893 98.628,105.893 101.194,103.327 v1(110.617,103.327) ; v1(113.843,142.418) 111.836,142.418 110.871,143.383 110.871,149.758 111.023,149.911 112.979,149.911 112.979,150.952 U5.3
  Bottom Layer w0.254: 82.338,82.008 v1@91.05,82.008 ; v1(94.031,82.017) v1(94.031,95.047) ; v1(110.617,103.327) 111.252,103.327 111.814,103.889 113.32,103.889 114.068,104.638 114.068,108.493 117.872,112.297 126.165,112.297 127.606,113.738 127.606,133.245 129.362,135.001 129.362,137.084 128.041,138.405 124.968,138.405 122.199,135.636 115.392,135.636 113.843,137.185 113.843,142.164 v1@113.817,142.189
  other v1: 82.042,81.737
PIO1_7: U2.47 U5.6 | length 126.5
  Top Layer w0.254: U2.47@79.197,84.643 79.197,83.949 79.809,83.337 82.017,83.337 82.169,83.185 v1@82.169,83.109 ; v1(91.11,83.134) 91.084,83.134 91.034,83.185 92.278,83.185 v1@92.939,82.525 ; v1@92.71,95.047 92.913,95.047 92.786,95.174 92.786,95.25 93.04,95.504 93.04,103.327 96.215,106.502 98.831,106.502 101.016,104.318 109.322,104.318 v1(109.347,104.343) ; v1@113.233,147.168 U5.6@114.529,147.168
  Bottom Layer w0.254: v1@82.169,83.109 90.957,83.109 91.034,83.185 91.084,83.134 v1(91.11,83.134) ; v1@92.71,95.047 92.913,95.047 92.634,94.767 92.939,94.463 v1@92.939,82.525 ; v1(109.347,104.343) 113.061,104.343 113.563,104.846 113.563,108.254 ; v1@113.081,146.99 113.081,135.153 113.741,134.493 125.578,134.493 ; 113.564,108.255 113.564,108.631 117.684,112.751 125.952,112.751 127.102,113.901 127.102,132.994 125.628,134.468
  other v1: 92.939,82.728 82.067,83.058 92.71,95.021 112.954,147.117
PIO1_8: U2.9
PIO1_9: U2.17
PIO1_10: U2.30
PIO1_11: U2.42
PIO2_0: LED1.2 U2.2 | length 93.8
  Top Layer w0.254: U2.2 82.041,86.513 82.423,86.131 v1(82.423,85.877) ; v1(81.153,143.51) 81.153,144.399 ; 81.155,144.423 LED1.2 ; v1(90.373,89.23) 91.338,90.195 96.545,90.195 98.831,92.481 98.831,100.305 95.606,103.53 v1(95.504,103.53) ; v1(91.034,111.582) 91.034,114.833 v1(91.11,114.91)
  Bottom Layer w0.254: v1(81.153,143.51) 81.204,143.561 86.233,143.561 86.97,142.824 86.97,127.965 85.725,126.721 85.725,120.294 v1(91.11,114.91) ; v1(82.423,85.877) 83.922,84.379 85.649,84.379 86.36,85.09 86.36,87.986 87.579,89.205 90.348,89.205 v1(90.373,89.23) ; v1(91.034,111.582) 91.034,104.572 92.075,103.53 v1(95.504,103.53)
PIO2_1: LED2.2 U2.13 | length 67.8
  Top Layer w0.254: U2.13 79.697,93.692 80.543,94.539 v1(80.543,94.691) ; v1@86.01,142.418 LED2.2
  Bottom Layer w0.254: v1(80.543,94.691) 80.543,102.438 87.732,109.626 87.732,110.439 87.605,110.566 81.204,110.566 ; 81.153,110.566 81.204,110.566 ; v1@85.979,142.291 85.979,134.722 81.204,129.946 81.204,110.566
  other v1: 86.004,142.316
PIO2_2: LED3.2 U2.26 | length 82.8
  Top Layer w0.254: v1@71.196,91.013 U2.26 ; v1@90.84,145.237 LED3.2
  Bottom Layer w0.254: v1(71.171,91.008) 71.171,117.881 68.326,120.726 68.326,144.424 69.19,145.288 90.78,145.288 v1(90.83,145.237)
PIO2_3: LED4.2 U2.38 | length 85.8
  Top Layer w0.254: v1(74.498,86.462) v1@74.642,86.462 ; v1@74.651,86.462 v1@74.642,86.462 ; U2.38 74.697,86.406 v1@74.642,86.462 ; v1(95.631,144.475) 95.631,145.009 95.67,144.969 ; LED4.2 95.67,144.969 ; v1@95.682,144.551 95.682,144.958 95.67,144.969
  Bottom Layer w0.254: v1(74.498,86.462) 73.762,87.198 73.762,142.469 75.768,144.475 v1(95.631,144.475)
PIO2_4: R26.2 U2.18 | length 32.4
  Top Layer w0.254: U2.18 77.197,93.605 79.632,96.041 86.693,96.041 v1(86.741,96.088) ; v1@97.104,89.052 R26.2
  Bottom Layer w0.254: v1(86.741,96.088) 93.929,96.088 94.767,96.926 96.622,96.926 97.079,96.469 v1@97.079,89.306
  other v1: 97.104,89.179
PIO2_5: R27.2 U2.21 | length 35.2
  Top Layer w0.254: U2.21@75.717,93.37 75.717,94.883 77.495,96.661 v1(77.495,97.917) ; v1(83.109,108.306) 83.185,108.229 v1@92.177,108.229 ; v1(98.882,108.28) R27.2
  Bottom Layer w0.254: v1(77.495,97.917) 77.495,100.838 83.109,106.451 v1(83.109,108.306) ; v1@92.507,108.28 v1(98.882,108.28)
  other v1: 92.304,108.229
PIO2_6: R34.2 U2.1 | length 34
  Top Layer w0.254: U2.1@81.026,86.004 81.026,85.293 81.61,84.709 v1@81.661,84.709 ; v1(81.305,77.318) 81.305,58.369 83.998,55.677 R34.2
  Bottom Layer w0.254: v1(81.305,77.318) 81.305,79.096 80.95,79.451 80.95,82.296 81.305,82.652 81.305,83.972 81.839,84.506 v1@81.839,84.557
  other v1: 81.94,84.633
PIO2_7: R35.2 U2.11 | length 43.1
  Top Layer w0.254: U2.11@81.572,91.021 82.156,91.021 v1(83.109,91.973) ; R35.2 v1@85.868,80.289
  Bottom Layer w0.254: v1(83.109,91.973) 83.109,92.024 85.369,94.285 86.639,94.285 87.681,95.326 91.872,95.326 91.872,81.356 90.932,80.416 v1@85.852,80.416
  other v1: 85.852,80.366
PIO2_8: R32.2 U2.12 | length 24.2
  Top Layer w0.254: R32.2@67.97,102.616 v1(74.752,102.616) ; v1@76.2,91.135 76.276,91.059 79.019,91.059 79.474,91.513 U2.12
  Bottom Layer w0.254: v1(74.752,102.616) 74.371,102.235 74.371,98.501 76.2,96.672 v1@76.2,91.135
  other v1: 76.175,91.059
PIO2_9: U2.24
PIO2_10: U2.25
PIO2_11: D6.2 U2.31 U7.4 | length 12.2
  Top Layer w0.254: U7.4 D6.2@65.748,90.868 ; D6.2@66.624,90.957 67.31,90.957 67.97,91.618 68.91,91.618 v1@68.936,91.643 ; v1(70.993,88.798) 70.993,88.773 70.942,88.722 71.12,88.722 71.329,88.513 U2.31
  Bottom Layer w0.254: v1@69.063,91.592 69.825,91.592 69.825,89.84 70.942,88.722 70.993,88.773 v1(70.993,88.798)
  other v1: 68.986,91.669
PIO3_0: R19.1 U2.36 U4.2 | length 80.4
  Top Layer w0.254: R19.1@65.329,148.692 65.329,150.393 66.04,151.105 U4.2 ; U2.36 72.922,84.71 72.923,84.709 v1(73,84.785) ; 65.354,146.101 67.361,144.094 ; 65.354,146.101 65.354,148.523 65.354,148.742 65.354,146.101 ; 67.361,144.094 69.266,144.094 69.52,144.094 67.361,144.094
  Bottom Layer w0.254: v1(73,84.785) 72.923,84.709 72.923,118.389 69.291,122.022 v1@69.291,143.866 ; v1@69.291,143.866 69.342,143.916 69.52,144.094 v1@69.291,143.866
  other v1: 69.266,143.993
PIO3_1: U2.37
PIO3_2: U2.43
PIO3_3: U2.48
VBUS: D8.1 J1.1 R13.2 | length 67.5
  Top Layer w0.254: R13.2@79.4,113.995 v1(82.245,113.995) ; v1@99.523,109.849 99.523,110.103 v1(99.797,109.83) 100.178,110.211 102.743,110.211 v1(103.099,110.566) ; v1(103.048,123.089) D8.1@103.048,125.603 ; v1(125.756,113.945) J1.1
  Bottom Layer w0.254: v1(82.245,113.995) 88.367,113.995 89.56,112.801 91.618,112.801 94.59,109.83 v1(99.797,109.83) ; v1(103.048,123.089) 103.048,113.945 ; v1(103.099,110.566) 103.048,110.617 103.048,113.945 ; v1(125.756,113.945) 103.048,113.945
VCC5: C9.2 C17.2 D1.2 D2.2 D3.2 D4.2 K1.2 K2.2 K3.8 K4.8 R19.2 R20.1 R36.1 U4.3 U5.16 VR2.2 VR2.4 | length 273
  Top Layer w0.254: v1@64.059,99.339 v1(63.906,99.187) R36.1@66.04,99.187 ; 64.389,130.302 67.716,130.302 68.25,130.835 68.25,138.532 ; R36.1@66.142,99.212 v1@75.413,99.212 ; C17.2@66.548,138.989 66.548,141.122 68.148,142.723 69.901,142.723 71.552,144.374 71.552,146.914 70.104,148.361 R19.2@67.183,148.361 ; C17.2@66.599,138.532 68.25,138.532 ; R19.2@67.412,148.488 R19.2@67.412,148.522 ; R19.2@67.428,148.523 R19.2@67.412,148.523 ; R19.2@67.673,148.26 R19.2@67.412,148.522 ; v1(71.907,153.492) 67.412,153.492 R19.2@67.412,148.523 ; VR2.2 VR2.4 68.25,138.532 ; v1(80.569,107.061) 80.62,107.112 v1(93.396,107.112) ; D3.2 97.581,46.056 K3.8@98.704,47.179 ; D4.2 97.549,60.16 K4.8@98.628,61.239 ; v1@97.358,103.937 v1(97.384,103.937) ; v1@97.523,103.772 104.044,97.251 D2.2 110.064,97.251 111.74,95.575 K2.2@111.74,93.847 ; K4.8@98.615,60.693 101.346,57.963 101.346,49.719 K3.8 ; K4.8 98.865,63.33 107.112,71.577 D1.2@107.112,78.359 ; D1.2 110.316,78.609 111.963,76.962 K1.2@111.963,74.524 ; K1.2 114.529,77.046 114.529,90.932 K2.2@112.039,93.421 ; v1(119.685,156.413) 119.736,156.362 U5.16@119.736,153.568 ; U5.16 121.234,153.492 121.717,153.975 C9.2@122.707,153.975 ; C9.2@122.834,154.026 122.834,154.889 123.61,155.665 R20.1 ; R19.2@67.412,148.522 R19.2 R19.2@67.412,148.523 ; R19.2@67.412,148.522 R19.2@67.412,148.523
  Bottom Layer w0.254: v1(63.906,99.187) 63.983,99.263 v1(63.983,130.327) ; v1(71.907,153.492) 105.308,153.492 108.331,156.515 119.685,156.515 v1(119.685,156.413) ; v1(75.438,99.212) 75.438,101.956 ; 75.489,101.981 v1(80.569,107.061) ; v1(93.396,107.112) 93.396,107.137 95.479,105.054 96.241,105.054 ; 96.266,105.054 v1(97.384,103.937)
VCC33: C1.2 C2.2 C3.2 C4.2 C8.1 C15.2 P1.1 P1.2 Q1.2 R1.2 R2.1 R9.1 R10.1 R11.2 R12.1 R14.1 R17.2 U1.2 U2.8 U2.44 U3.1 U5.1 VR1.2 VR1.4 | length 309.4
  Top Layer w0.254: U1.2 C1.2@48.387,129.997 ; C1.2@48.489,129.997 53.721,129.997 ; R17.2@48.717,140.894 50.851,140.894 50.927,140.97 ; U3.1@54.102,153.543 52.502,153.543 50.927,151.968 50.927,140.97 ; U3.1@54.153,153.899 54.153,155.651 54.524,156.022 C4.2 54.524,159.095 55.489,160.061 57.49,160.061 59.639,157.912 95.682,157.912 R12.1@95.783,158.013 ; C15.2@66.497,127.457 55.22,127.457 53.721,128.956 53.721,129.997 ; C15.2 69.301,127.315 69.748,127.762 71.704,127.762 VR1.4@71.755,127.711 ; VR1.4@71.831,127.711 74.625,127.711 ; v1(74.651,126.67) 74.625,126.695 74.625,127.711 ; VR1.2 74.625,127.711 ; U2.44@77.699,84.201 77.699,81.97 77.815,81.854 v1(77.815,79.309) ; R2.1 v1@77.815,76.276 ; R2.1@77.953,51.562 79.451,51.562 80.67,50.343 80.67,48.031 80.643,48.004 P1.1 P1.2 ; U2.8@81.178,89.51 81.194,89.525 83.404,89.525 83.576,89.698 C2.2 85.217,91.465 v1(85.319,91.567) ; R14.1@85.492,112.035 R14.1@86.03,112.035 ; v1(85.547,109.677) R14.1@85.547,111.633 ; R14.1@86.03,112.039 86.573,112.039 91.449,116.916 R1.2@100.559,116.916 ; 87.173,112.598 v1(88.671,111.1) ; v1@87.681,94.082 87.681,97.892 v1(88.925,99.136) ; R12.1 110.88,157.928 111.29,157.518 ; R1.2@101.28,117.135 Q1.2 ; C8.1 U5.1@114.62,153.553 ; C8.1@111.29,153.632 111.29,157.518 ; 111.328,157.48 111.29,157.518 ; 50.927,140.97 53.772,138.125 53.772,130.048 53.721,129.997
  Bottom Layer w0.254: v1(74.651,126.67) 74.651,110.465 75.413,109.703 85.522,109.703 v1(85.547,109.677) ; v1(77.8,76.302) 95.58,76.302 98.12,78.842 98.12,99.111 97.968,99.263 v1@88.925,99.263 ; v1@77.815,76.429 v1(77.815,79.309) ; v1(85.319,91.567) 87.63,93.878 87.63,93.98 87.681,94.031 v1@87.681,94.082 ; v1(88.671,111.1) 88.925,110.846 v1@88.925,99.263 ; v1(88.925,99.136) v1@88.925,99.263
  other v1: 87.732,94.158
pads on no net: J1.4 J1.6 J1.7 J1.8 J1.9 J1.MH1 J1.MH2 K3.5 K3.6 K4.5 K4.6 P1.3 P1.5 P1.11 P1.17 P1.19 Reset.1 U5.10 U5.11 U5.14
copper on no net:
  other v2: -44,58.5

## Keep-outs
Keep-Out Layer:
  the board outline again, w0.254

## Text inside footprints (layer, text, board x,y; h text height)
D5: Top Overlay "~" at 109.449,136.754 h1.5 r90; Top Overlay "~" at 109.449,130.404 h1.5 r90; Top Overlay "-" at 103.734,130.531 h1.5 r90; Top Overlay "+" at 103.861,136.754 h1.5 r90
J1: Mechanical 1 "PCB Edge" at 137.432,111.508 h0.25 r90
J3: Mechanical 1 "Mech 2 - Clearance, move to internal plane if present" at 136.714,126.404 h0.3 r180; Mechanical 1 "Mech 1 - Slot cut-out" at 136.714,125.905 h0.3 r180; Mechanical 1 "Assign keep-out area to slot" at 136.714,124.904 h0.3 r180; Mechanical 1 "Alert PCB fab to slot details" at 136.714,125.404 h0.3 r180
P1: Top Overlay "20" at 52.068,46.01 h1.27 r180; Top Overlay "19" at 52.068,48.55 h1.27 r180; Top Overlay "1" at 86.866,48.423 h1.27 r180; Top Overlay "2" at 87.12,45.756 h1.27 r180
U3: Top Overlay "1" at 53.474,151.163 h1.5 r270; Top Overlay "3" at 55.994,151.453 h1.5 r270
U4: Top Overlay "3" at 66.56,151.402 h1.5 r270; Top Overlay "1" at 64.04,151.112 h1.5 r270